# Allegro board GAMEBOARD6.brd
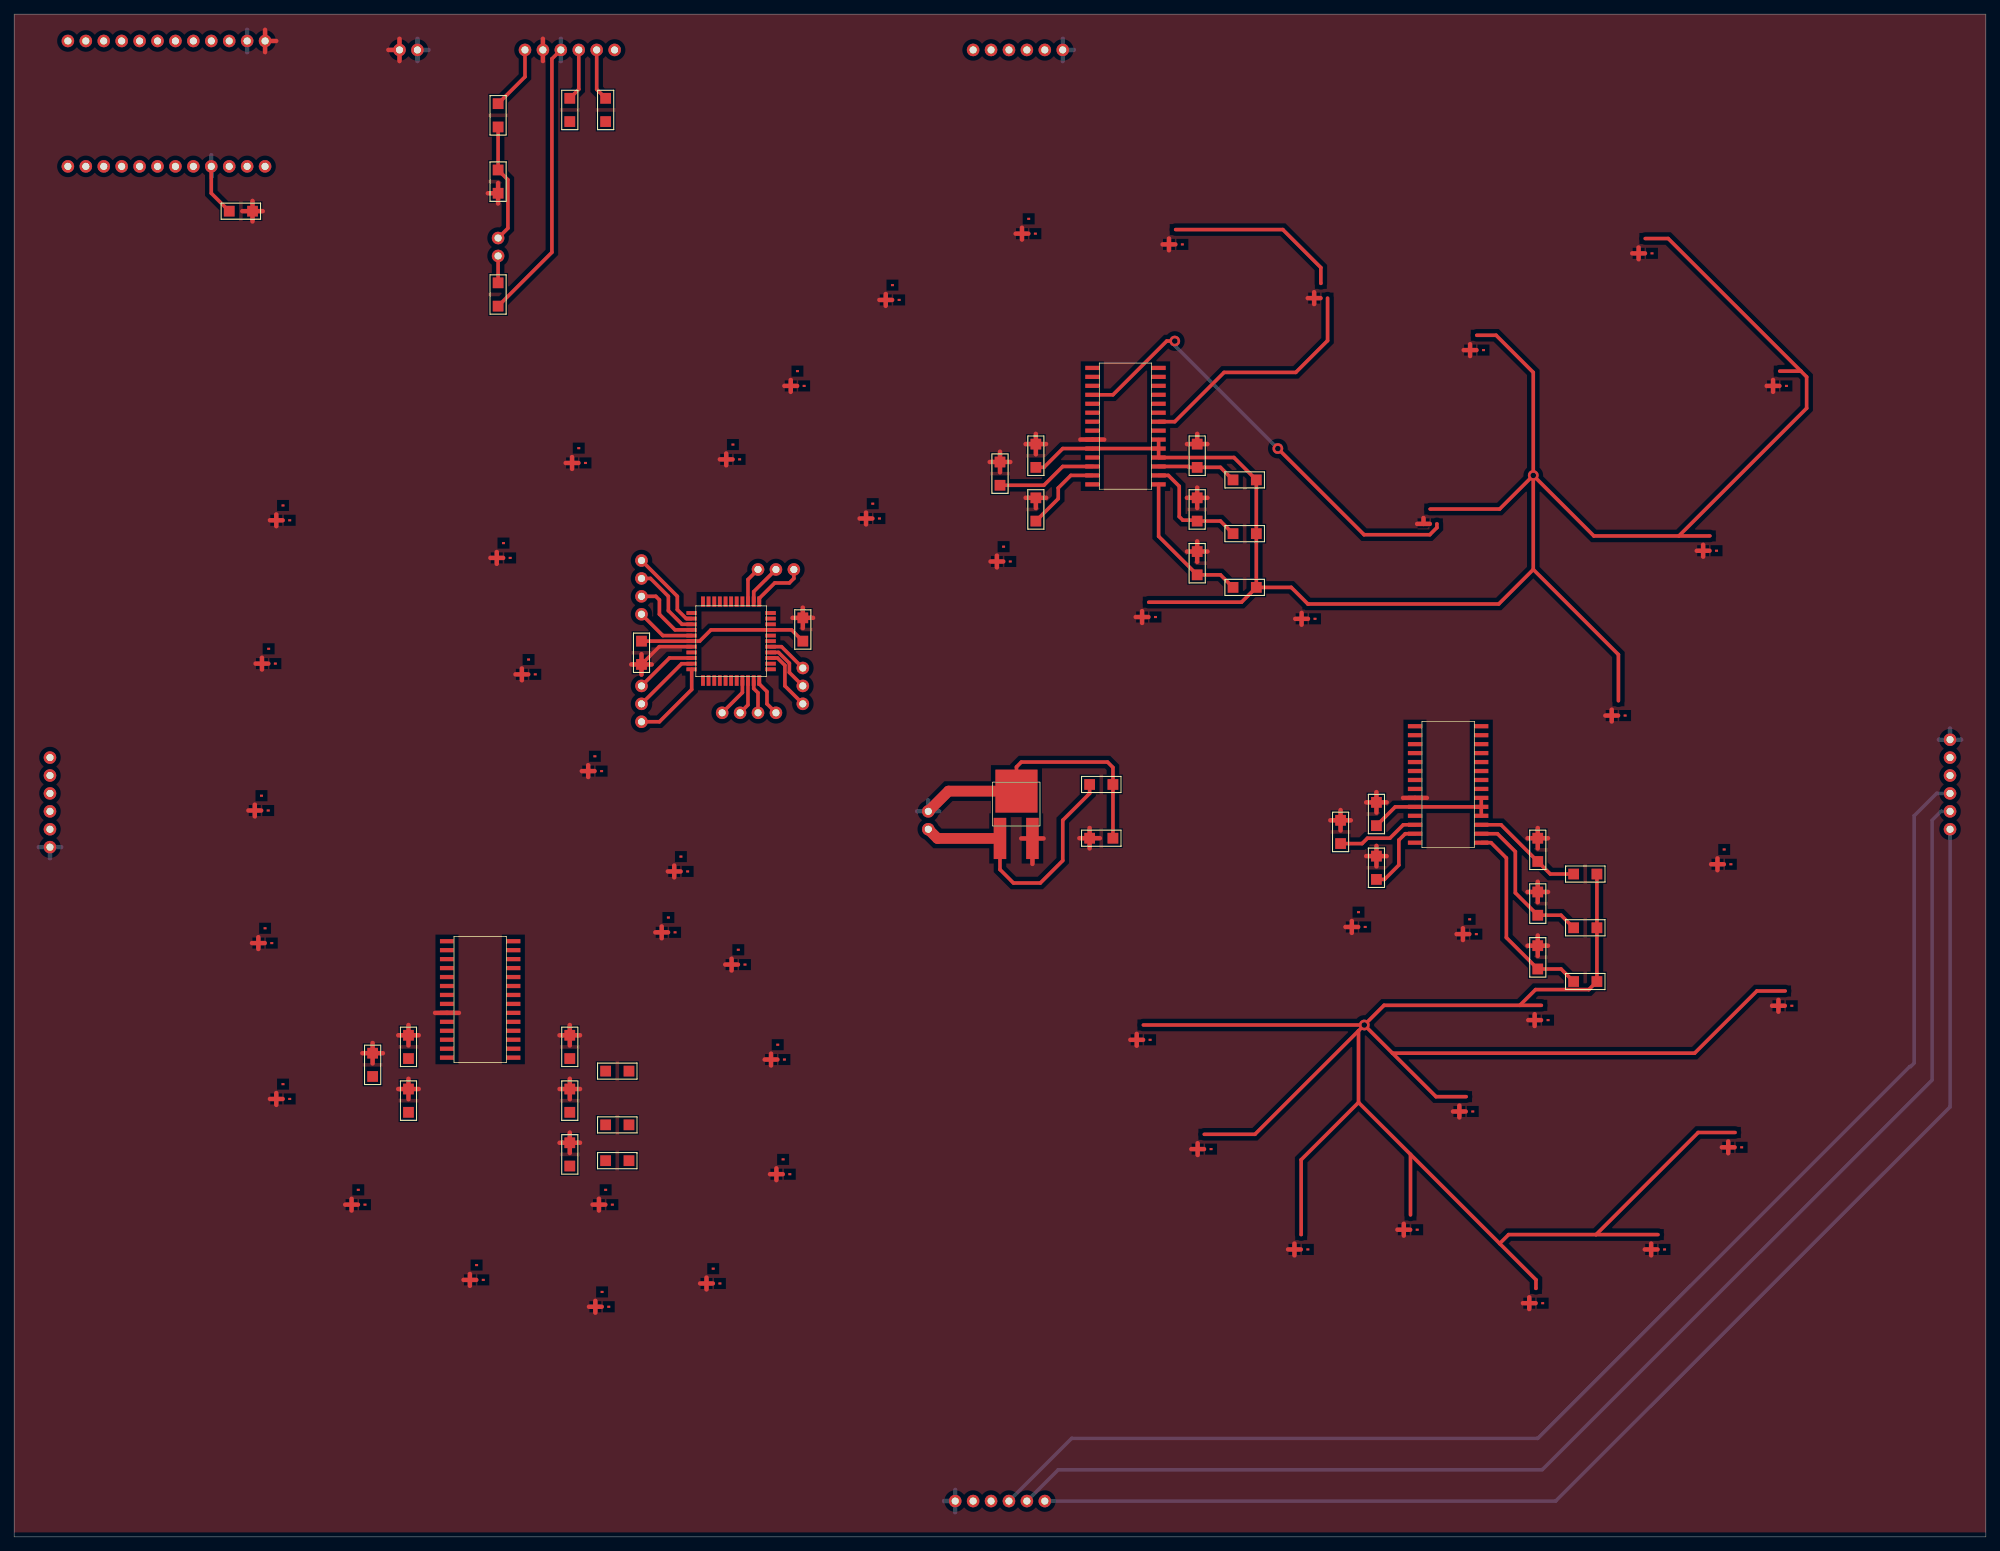
[diagram p0: board, top side]
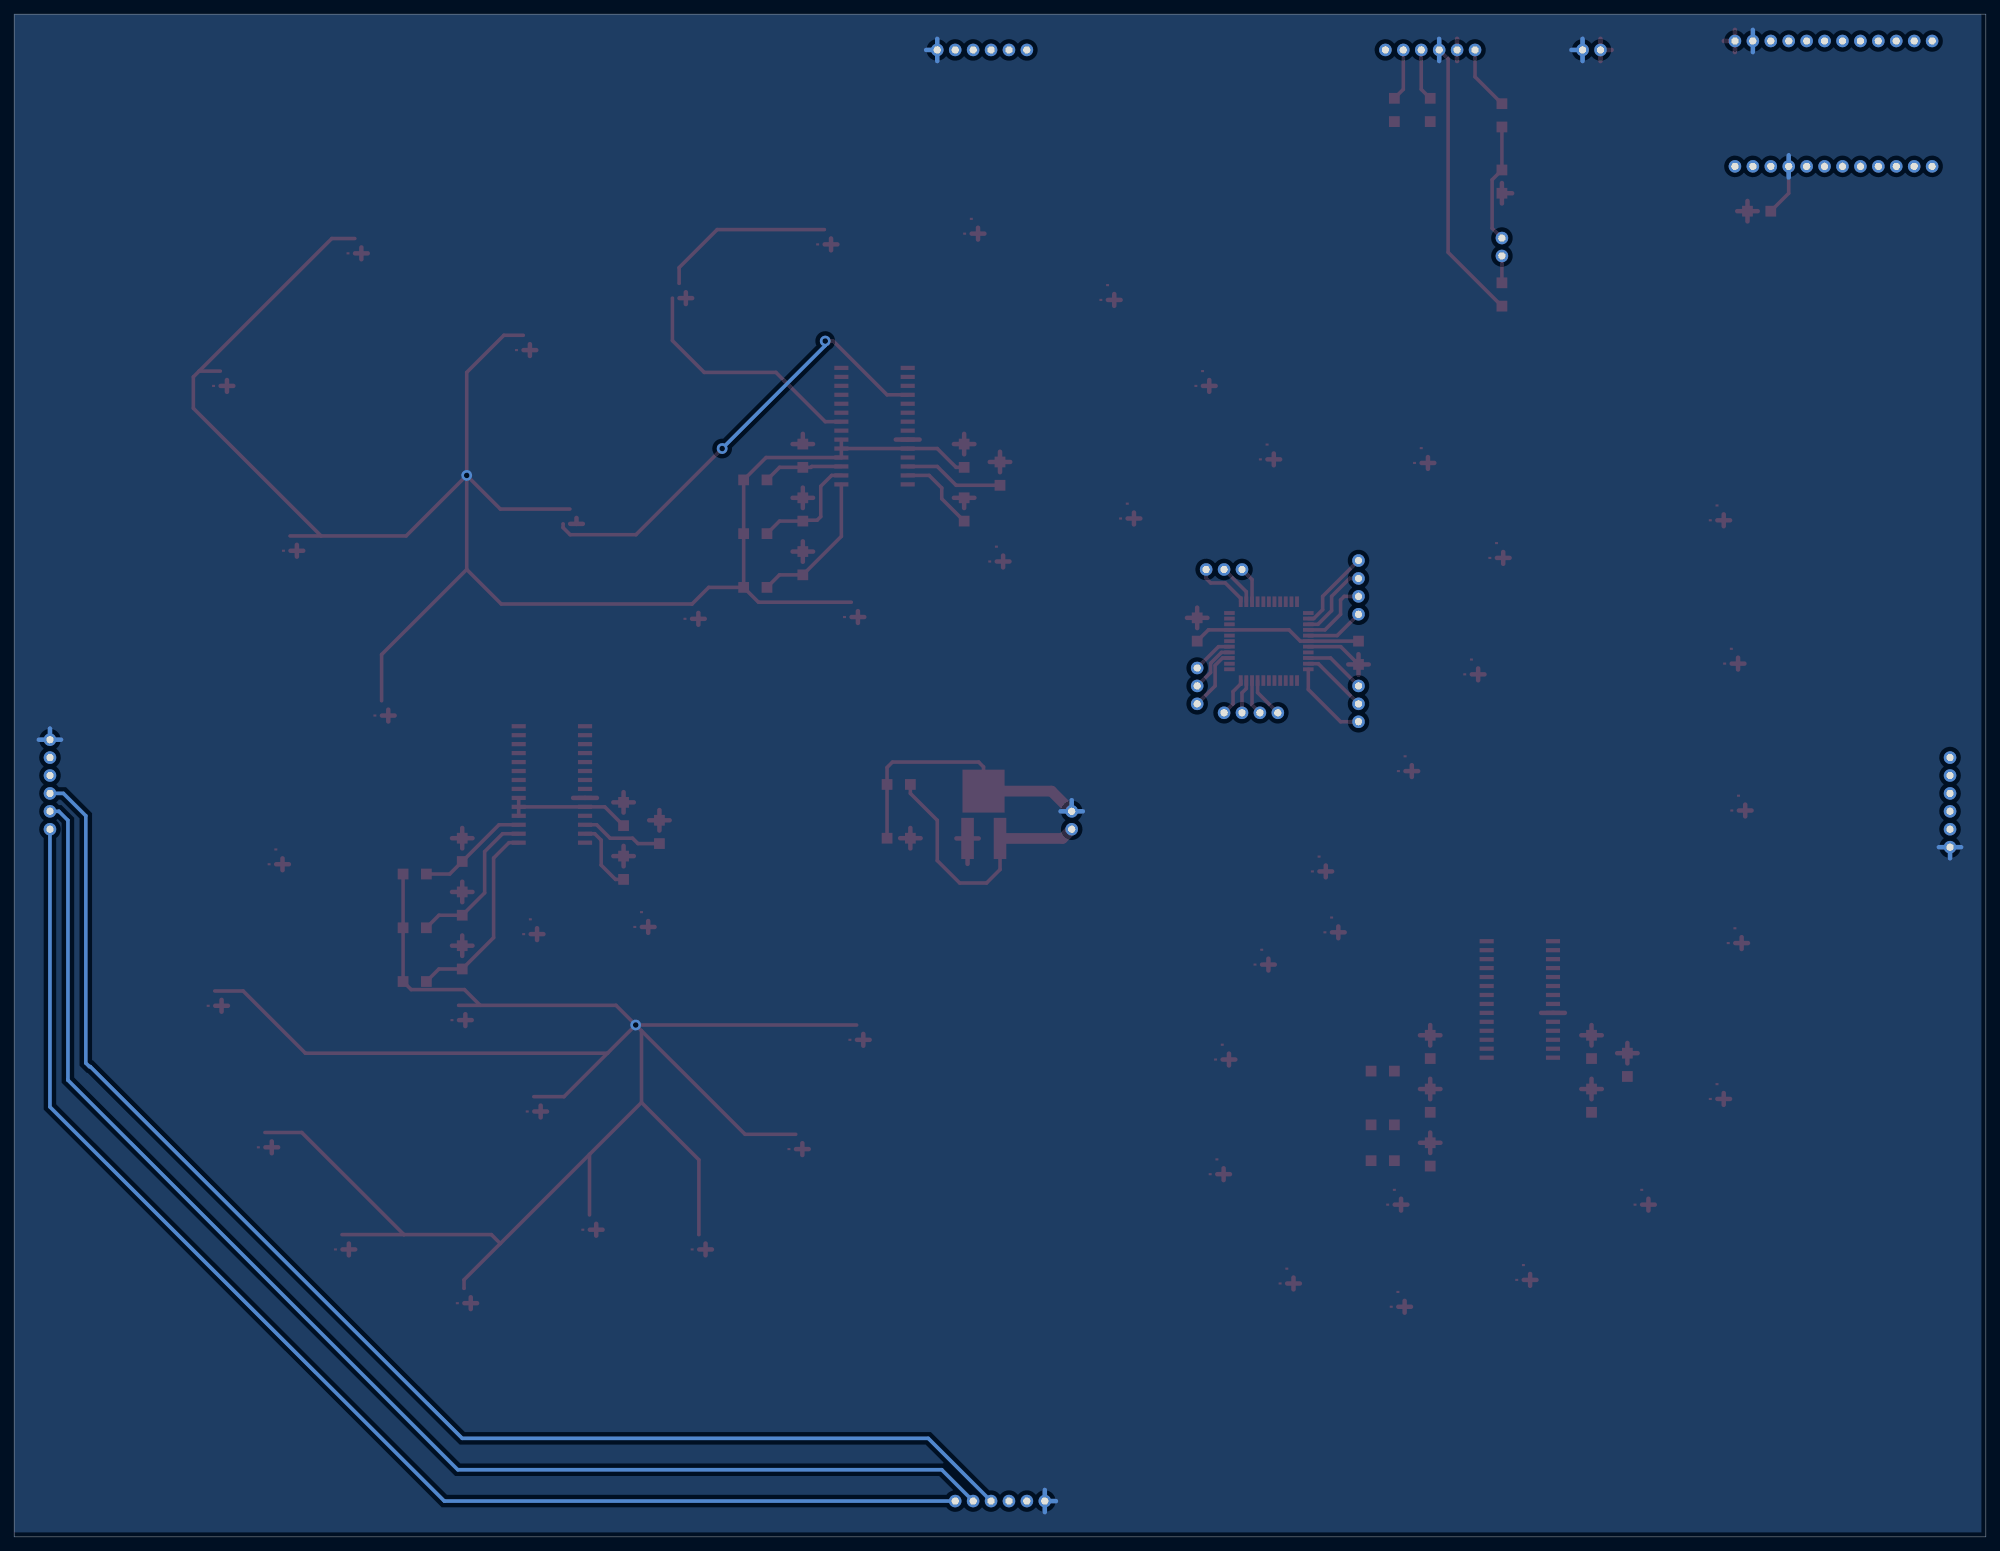
[diagram p1: board, bottom side, seen from below]

Outline 279.4 x 215.9 mm; copper layers: TOP, BOTTOM. Coordinates in mm from the lower left corner of the outline.
Outline path: 0,215.9 0,0 279.4,0 279.4,215.9 0,215.9

## Placement (name value [footprint] x y rotation side)
BT1  7.2V  [HEADER1X2]  129.54 101.6 180 top
C1  0.1 uF, 15V  [SMC1206]  111.76 127 90 top
C2  0.1 uF, 15V  [SMC1206]  88.9 127 270 top
C3  0.1uF  [SMC1206]  30.48 187.96 0 top
C4  0.1 uF, 15V  [SMC1206]  193.04 104.14 270 top
C5  0.1 uF, 15V  [SMC1206]  144.78 154.94 270 top
C6  0.1 uF, 15V  [SMC1206]  55.88 71.12 270 top
C7  0.1uF, 15V  [SMC1206]  152.4 106.68 0 top
C8  0.1uF, 15V  [SMC1206]  152.4 99.06 0 top
C9  0.1 uF, 15V  [SMC1206]  68.58 177.8 270 top
J1  CON3  [HEADER1X3]  106.68 137.16 90 top
J2  CON4  [HEADER1X4]  88.9 132.08 180 top
J3  CON3  [HEADER1X3]  111.76 121.92 0 top
J4  CON3  [HEADER1X3]  88.9 116.84 180 top
J5  CON4  [HEADER1X4]  106.68 116.84 270 top
J6  CON6  [HEADER1X6]  73.66 210.82 90 top
J7  JUMPER  [HEADER1X2]  68.58 182.88 180 top
J8  CON2  [HEADER1X2]  55.88 210.82 90 top
J9  Board Connector  [HEADER1X6]  5.08 109.22 0 top
J10  Board Connector  [HEADER1X6]  137.16 210.82 90 top
J11  Board Connector  [HEADER1X6]  274.32 101.6 180 top
J12  Board Connector  [HEADER1X6]  144.78 5.08 270 top
R1  22 ohm, 1/4W  [SMR1206]  83.82 200.66 90 top
R2  22 ohm, 1/4W  [SMR1206]  78.74 200.66 90 top
R3  10 kohm, 1/4W  [SMR1206]  68.58 190.5 90 top
R4  1 kohm, 1/4W  [SMR1206]  187.96 101.6 270 top
R5  1 kohm, 1/4W  [SMR1206]  139.7 152.4 270 top
R6  1 kohm, 1/4W  [SMR1206]  50.8 68.58 270 top
R7  220 ohm, 1/4W  [SMR1206]  68.58 203.2 270 top
R8  1 kohm, 1/4W  [SMR1206]  193.04 96.52 270 top
R9  1 kohm, 1/4W  [SMR1206]  144.78 147.32 270 top
R10  1 kohm, 1/4W  [SMR1206]  55.88 63.5 270 top
R11  1 kohm, 1/4W  [SMR1206]  215.9 99.06 270 top
R12  1 kohm, 1/4W  [SMR1206]  167.64 154.94 270 top
R13  1 kohm, 1/4W  [SMR1206]  78.74 71.12 270 top
R14  0 ohm, 1/4W  [SMR1206]  220.98 93.98 0 top
R15  0 ohm, 1/4W  [SMR1206]  172.72 149.86 0 top
R16  0 ohm, 1/4W  [SMR1206]  83.82 66.04 0 top
R17  1 kohm, 1/4W  [SMR1206]  215.9 91.44 270 top
R18  1 kohm, 1/4W  [SMR1206]  167.64 147.32 270 top
R19  1 kohm, 1/4W  [SMR1206]  78.74 63.5 270 top
R20  0 ohm, 1/4W  [SMR1206]  220.98 86.36 0 top
R21  0 ohm, 1/4W  [SMR1206]  172.72 142.24 0 top
R22  100 kohm, 1/4W  [SMR1206]  83.82 58.42 0 top
R23  1 kohm, 1/4W  [SMR1206]  215.9 83.82 270 top
R24  1 kohm, 1/4W  [SMR1206]  167.64 139.7 270 top
R25  1 kohm, 1/4W  [SMR1206]  78.74 55.88 270 top
R26  0 ohm, 1/4W  [SMR1206]  220.98 78.74 0 top
R27  100 kohm, 1/4W  [SMR1206]  172.72 134.62 0 top
R28  0 ohm, 1/4W  [SMR1206]  83.82 53.34 0 top
U1  -  [TCS40DPR]  38.1 145.03 0 top
U2  -  [TCS40DPR]  190.5 87.38 0 top
U3  -  [TCS40DPR]  250.19 164.08 0 top
U4  -  [TCS40DPR]  231.14 182.88 0 top
U5  -  [TCS40DPR]  72.9 123.19 0 top
U6  -  [TCS40DPR]  82.3 109.47 0 top
U7  -  [TCS40DPR]  206.25 86.36 0 top
U8  -  [TCS40DPR]  216.41 74.17 0 top
U9  -  [TCS40DPR]  207.26 169.16 0 top
U10  -  [TCS40DPR]  185.17 176.53 0 top
U11  -  [TCS40DPR]  94.49 95.25 0 top
U12  -  [TCS40DPR]  102.62 82.04 0 top
U13  PIC18F47K40-I/PT  [TQFPPIC18F47K40]  101.6 127 0 top
U14  -  [TCS40DPR]  205.74 61.21 0 top
U15  -  [TCS40DPR]  197.87 44.45 0 top
U16  -  [TCS40DPR]  164.59 184.15 0 top
U17  -  [TCS40DPR]  143.76 185.67 0 top
U18  -  [TCS40DPR]  108.2 68.58 0 top
U19  -  [TCS40DPR]  108.97 52.32 0 top
U20  -  [TCS40DPR]  160.02 71.37 0 top
U21  -  [TCS40DPR]  168.66 55.88 0 top
U22  -  [TCS40DPR]  124.46 176.28 0 top
U23  -  [TCS40DPR]  111 164.08 0 top
U24  -  [TCS40DPR]  99.06 36.83 0 top
U25  -  [TCS40DPR]  83.31 33.53 0 top
U26  -  [TCS40DPR]  182.37 41.66 0 top
U27  -  [TCS40DPR]  215.65 34.04 0 top
U28  -  [TCS40DPR]  200.66 144.53 0 top
U29  -  [TCS40DPR]  183.39 131.06 0 top
U30  -  [TCS40DPR]  92.71 86.61 0 top
U31  -  [TCS40DPR]  83.82 48.01 0 top
U32  -  [TCS40DPR]  232.92 41.66 0 top
U33  -  [TCS40DPR]  243.84 56.13 0 top
U34  -  [TCS40DPR]  160.78 131.32 0 top
U35  -  [TCS40DPR]  140.21 139.19 0 top
U36  -  [TCS40DPR]  65.53 37.34 0 top
U37  -  [TCS40DPR]  48.77 48.01 0 top
U38  -  [TCS40DPR]  250.95 76.2 0 top
U39  -  [TCS40DPR]  242.32 96.27 0 top
U40  -  [TCS40DPR]  121.67 145.29 0 top
U41  -  [TCS40DPR]  101.85 153.67 0 top
U42  -  [TCS40DPR]  38.1 62.99 0 top
U43  -  [TCS40DPR]  35.56 85.09 0 top
U45  -  [TCS40DPR]  227.33 117.35 0 top
U46  -  [TCS40DPR]  240.28 140.72 0 top
U47  -  [TCS40DPR]  80.01 153.16 0 top
U48  -  [TCS40DPR]  69.34 139.7 0 top
U49  -  [TCS40DPR]  35.05 103.89 0 top
U50  -  [TCS40DPR]  36.07 124.71 0 top
U51  MCP23017T  [MCP23017]  203.2 106.68 0 top
U52  MCP23017T  [MCP23017]  157.48 157.48 0 top
U53  MCP23017T  [MCP23017]  66.04 76.2 0 top
U54  MIC29310-5.0WU  [TO252AA]  139.7 99.06 0 top
U57  Photon  [PHOTONFOOTPRINT]  15.24 203.2 90 top

## Library data of the parts
BT1 = BATTERY
C1-C9 = CAP NP
J1 J3 J4 = CON3
J2 J5 = CON4
J6 = CON6
J7 = JUMPER
J8 = CON2
J9-J12 = Board Connector
R1-R28 = R
U1-U12 U14-U43 U45-U50 = TCS40DPR
U13 = PIC18F47K40-I/PT_0
U51-U53 = MCP23017T
U54 = MIC29310-5.0WU
U57 = Photon

## Footprints (pads in the part's own frame, mm; a bottom-side part is the same pattern mirrored in y, then rotated)
HEADER1X2
  round 1.778 hole 1.016: 1(0,1.27) 2(0,-1.27)
HEADER1X3
  round 1.778 hole 1.016: 1(0,1.27) 2(0,-1.27) 3(0,-3.81)
HEADER1X4
  round 1.778 hole 1.016: 1(0,1.27) 2(0,-1.27) 3(0,-3.81) 4(0,-6.35)
HEADER1X6
  round 1.778 hole 1.016: 1(0,1.27) 2(0,-1.27) 3(0,-3.81) 4(0,-6.35) 5(0,-8.89) 6(0,-11.43)
MCP23017
  rect 2x0.6 smd: 1(-4.699,8.255) 2(-4.699,6.985) 3(-4.699,5.715) 4(-4.699,4.445) 5(-4.699,3.175) 6(-4.699,1.905) 7(-4.699,0.635) 8(-4.699,-0.635) 9(-4.699,-1.905) 10(-4.699,-3.175) 11(-4.699,-4.445) 12(-4.699,-5.715) 13(-4.699,-6.985) 14(-4.699,-8.255) 15(4.699,-8.255) 16(4.699,-6.985) 17(4.699,-5.715) 18(4.699,-4.445) 19(4.699,-3.175) 20(4.699,-1.905) 21(4.699,-0.635) 22(4.699,0.635) 23(4.699,1.905) 24(4.699,3.175) 25(4.699,4.445) 26(4.699,5.715) 27(4.699,6.985) 28(4.699,8.255)
PHOTONFOOTPRINT
  round 1.778 hole 1.016: 1(8.89,7.62) 2(8.89,5.08) 3(8.89,2.54) 4(8.89,0) 5(8.89,-2.54) 6(8.89,-5.08) 7(8.89,-7.62) 8(8.89,-10.16) 9(8.89,-12.7) 10(8.89,-15.24) 11(8.89,-17.78) 12(8.89,-20.32) 13(-8.89,7.62) 14(-8.89,5.08) 15(-8.89,2.54) 16(-8.89,0) 17(-8.89,-2.54) 18(-8.89,-5.08) 19(-8.89,-7.62) 20(-8.89,-10.16) 21(-8.89,-12.7) 22(-8.89,-15.24) 23(-8.89,-17.78) 24(-8.89,-20.32)
SMC1206
  rect 1.524x1.524 smd: 1(0,0) 2(3.302,0)
SMR1206
  rect 1.524x1.524 smd: 1(0,0) 2(3.302,0)
TCS40DPR
  rect 0.42x0.3 smd: 1(-0.95,-0.9) 2(0.95,-0.9) 3(0,1.2)
TO252AA
  rect 1.778x5.842 smd: 1(-0.004,-0.034) 3(4.596,-0.034)
  rect 5.969x6.096 smd: 2(2.332,6.673)
TQFPPIC18F47K40
  rect 1.5x0.55 smd: 1(-5.588,3.988) 2(-5.588,3.2) 3(-5.588,2.388) 4(-5.588,1.6) 5(-5.588,0.787) 6(-5.588,0) 7(-5.588,-0.787) 8(-5.588,-1.6) 9(-5.588,-2.388) 10(-5.588,-3.2) 11(-5.588,-3.988) 23(5.588,-3.988) 24(5.588,-3.2) 25(5.588,-2.388) 26(5.588,-1.6) 27(5.588,-0.787) 28(5.588,0) 29(5.588,0.787) 30(5.588,1.6) 31(5.588,2.388) 32(5.588,3.2) 33(5.588,3.988)
  rect 0.55x1.5 smd: 12(-3.988,-5.588) 13(-3.2,-5.588) 14(-2.388,-5.588) 15(-1.6,-5.588) 16(-0.787,-5.588) 17(0,-5.588) 18(0.787,-5.588) 19(1.6,-5.588) 20(2.388,-5.588) 21(3.2,-5.588) 22(3.988,-5.588) 34(3.988,5.588) 35(3.2,5.588) 36(2.388,5.588) 37(1.6,5.588) 38(0.787,5.588) 39(0,5.588) 40(-0.787,5.588) 41(-1.6,5.588) 42(-2.388,5.588) 43(-3.2,5.588) 44(-3.988,5.588)

## Nets
GND: BT1.2(-) C1.1 C2.1 C3.1 C4.2 C5.2 C6.2 C7.2 C8.2 C9.2 J6.3 J8.2 J9.6(GND) J10.6(GND) J11.6(GND) J12.6(GND) R14.2 R15.2 R16.2 R20.2 R21.2 R22.2 R26.2 R27.2 R28.2 U1.3(GND) U2.3(GND) U3.3(GND) U4.3(GND) U5.3(GND) U6.3(GND) U7.3(GND) U8.3(GND) U9.3(GND) U10.3(GND) U11.3(GND) U12.3(GND) U13.6(VSS_0) U13.30(VSS_1) U14.3(GND) U15.3(GND) U16.3(GND) U17.3(GND) U18.3(GND) U19.3(GND) U20.3(GND) U21.3(GND) U22.3(GND) U23.3(GND) U24.3(GND) U25.3(GND) U26.3(GND) U27.3(GND) U28.3(GND) U29.3(GND) U30.3(GND) U31.3(GND) U32.3(GND) U33.3(GND) U34.3(GND) U35.3(GND) U36.3(GND) U37.3(GND) U38.3(GND) U39.3(GND) U40.3(GND) U41.3(GND) U42.3(GND) U43.3(GND) U45.3(GND) U46.3(GND) U47.3(GND) U48.3(GND) U49.3(GND) U50.3(GND) U51.10(VSS) U51.18(RESET) U51.19(INTB) U51.20(INTA) U52.10(VSS) U52.18(RESET) U52.19(INTB) U52.20(INTA) U53.10(VSS) U53.18(RESET) U53.19(INTB) U53.20(INTA) U54.2(GND) U57.11 U57.21
5 V: C1.2 C2.2 C3.2 C4.1 C5.1 C6.1 C8.1 J6.2 J8.1 R3.1 R4.1 R5.1 R6.1 R8.1 R9.1 R10.1 R11.1 R12.1 R13.1 R17.1 R18.1 R19.1 R23.1 R24.1 R25.1 U1.1(VCC) U2.1(VCC) U3.1(VCC) U4.1(VCC) U5.1(VCC) U6.1(VCC) U7.1(VCC) U8.1(VCC) U9.1(VCC) U10.1(VCC) U11.1(VCC) U12.1(VCC) U13.7(VDD_0) U13.28(VDD_1) U14.1(VCC) U15.1(VCC) U16.1(VCC) U17.1(VCC) U18.1(VCC) U19.1(VCC) U20.1(VCC) U21.1(VCC) U22.1(VCC) U23.1(VCC) U24.1(VCC) U25.1(VCC) U26.1(VCC) U27.1(VCC) U28.1(VCC) U29.1(VCC) U30.1(VCC) U31.1(VCC) U32.1(VCC) U33.1(VCC) U34.1(VCC) U35.1(VCC) U36.1(VCC) U37.1(VCC) U38.1(VCC) U39.1(VCC) U40.1(VCC) U41.1(VCC) U42.1(VCC) U43.1(VCC) U45.1(VCC) U46.1(VCC) U47.1(VCC) U48.1(VCC) U49.1(VCC) U50.1(VCC) U51.9(VDD) U52.9(VDD) U53.9(VDD) U54.3(OUT) U57.12
CD1: J9.5(CD) U13.39(RD0)
CD2: J10.5(CD) U13.38(RD1)
CD3: J11.5(CD) U13.33(RA6)
CD4: J12.5(CD) U13.32(RA7)
ICSPCLK: R1.1 U13.16(ICSPCLK/RB6)
ICSPDAT: R2.1 U13.17(ICSPDAT/RB7)
MCLR/VPP: J6.1 R7.1 U13.18(VPP/MCLR/RE3)
SCK: R4.2 R5.2 R6.2 U13.37(RC3) U51.12(SCK) U52.12(SCK) U53.12(SCK) U57.14
SCK1: J9.1(SCK) J10.1(SCK) J11.1(SCK) J12.1(SCK)
SDA: R8.2 R9.2 R10.2 U13.42(RC4) U51.13(SDA) U52.13(SDA) U53.13(SDA) U57.13
SDI1: J9.2(SDI) J10.2(SDI) J11.2(SDI) J12.2(SDI)
SDO1: J9.3(SDO) J10.3(SDO) J11.3(SDO) J12.3(SDO)
SS1: J9.4(SS) U13.44(RC6)
SS2: J10.4(SS) U13.43(RC5)
SS3: J11.4(SS) U13.41(RD3)
SS4: J12.4(SS) U13.40(RD2)
N40578: U6.2(VOUT) U53.21(GPA0)
N40604: U12.2(VOUT) U53.22(GPA1)
N40612: U19.2(VOUT) U53.23(GPA2)
N40620: U25.2(VOUT) U53.24(GPA3)
N40628: U31.2(VOUT) U53.25(GPA4)
N40636: U37.2(VOUT) U53.26(GPA5)
N40644: U43.2(VOUT) U53.27(GPA6)
N40652: U50.2(VOUT) U53.28(GPA7)
N41000: R19.2 R22.1 U53.16(A1)
N41020: R25.2 R28.1 U53.15(A0)
N41032: R13.2 R16.1 U53.17(A2)
N41290: U1.2(VOUT) U51.8(GPB7)
N41302: U7.2(VOUT) U51.7(GPB6)
N41314: U14.2(VOUT) U51.6(GPB5)
N41326: U20.2(VOUT) U51.5(GPB4)
N41338: U26.2(VOUT) U51.4(GPB3)
N41350: U32.2(VOUT) U51.3(GPB2)
N41362: U38.2(VOUT) U51.2(GPB1)
N41374: U45.2(VOUT) U51.1(GPB0)
N41442: U2.2(VOUT) U51.21(GPA0)
N41446: U8.2(VOUT) U51.22(GPA1)
N41450: U15.2(VOUT) U51.23(GPA2)
N41454: U21.2(VOUT) U51.24(GPA3)
N41458: U27.2(VOUT) U51.25(GPA4)
N41462: U33.2(VOUT) U51.26(GPA5)
N41466: U39.2(VOUT) U51.27(GPA6)
N41734: U46.2(VOUT) U51.28(GPA7)
N42242: R17.2 R20.1 U51.16(A1)
N42246: R23.2 R26.1 U51.15(A0)
N42268: R11.2 R14.1 U51.17(A2)
N42276: R24.2 R27.1 U52.15(A0)
N42308: R18.2 R21.1 U52.16(A1)
N42508: J7.2 R3.2 R7.2
N42712: U3.2(VOUT) U52.8(GPB7)
N42740: U9.2(VOUT) U52.7(GPB6)
N42752: U16.2(VOUT) U52.6(GPB5)
N42772: U22.2(VOUT) U52.5(GPB4)
N42784: U28.2(VOUT) U52.4(GPB3)
N42796: U34.2(VOUT) U52.3(GPB2)
N42808: U40.2(VOUT) U52.2(GPB1)
N42820: U47.2(VOUT) U52.1(GPB0)
N42884: U4.2(VOUT) U52.21(GPA0)
N42896: U10.2(VOUT) U52.22(GPA1)
N42900: U17.2(VOUT) U52.23(GPA2)
N42904: U23.2(VOUT) U52.24(GPA3)
N42908: U29.2(VOUT) U52.25(GPA4)
N42912: U35.2(VOUT) U52.26(GPA5)
N42916: U41.2(VOUT) U52.27(GPA6)
N43192: U48.2(VOUT) U52.28(GPA7)
N43224: C9.1 J7.1
N43624: R12.2 R15.1 U52.17(A2)
N43852: U5.2(VOUT) U53.8(GPB7)
N43864: U11.2(VOUT) U53.7(GPB6)
N43876: U18.2(VOUT) U53.6(GPB5)
N43888: U24.2(VOUT) U53.5(GPB4)
N43900: U30.2(VOUT) U53.4(GPB3)
N43912: U36.2(VOUT) U53.3(GPB2)
N43924: U42.2(VOUT) U53.2(GPB1)
N43936: U49.2(VOUT) U53.1(GPB0)
N104053: BT1.1(+) C7.1 U54.1(IN)
N111887: J6.4 R2.2
N111889: J6.5 R1.2
N118143: J3.1 U13.27(RE2)
N118150: J3.2 U13.26(RE1)
N118163: J3.3 U13.25(RE0)
N118167: J5.1 U13.22(RA3)
N118185: J5.4 U13.19(RA0)
N118192: J2.4 U13.2(RD4)
N118196: J2.3 U13.3(RD5)
N118203: J2.2 U13.4(RD6)
N118215: J2.1 U13.5(RD7)
N118227: J4.3 U13.9(RB0)
N118234: J4.2 U13.10(RB1)
N118238: J4.1 U13.11(RB2)
N118679: J1.1 U13.36(RC2)
N118686: J1.2 U13.35(RC1)
N118690: J1.3 U13.34(RC0)
N128561: J5.2 U13.21(RA2)
N128579: J5.3 U13.20(RA1)

Pads without a net: J6 6; U13 1 8 12 13 14 15 23 24 29 31; U51 11 14; U52 11 14; U53 11 14; U57 1 2 3 4 5 6 7 8 9 10 15 16 17 18 19 20 22 23 24

## Via types
v1: diameter 1.524, hole 0.8, TOP to BOTTOM, 4 vias

## Routing (per net, layer and track width the routed paths; a pad name or vN(x,y) marks a point on that pad's centre or on a via; arc(x,y) is an arc through that point)
GND: length 793.4
  TOP w0.508: C8.2 C7.2 155.7,109.09 154.94,109.86 142.73,109.86 142.03,109.16 U54.2 ; v1(215.26,150.5) 215.26,137.16 ; v1(215.26,150.5) 223.84,141.92 235.9,141.92 ; v1(215.26,150.5) 215.26,165.1 210,170.36 U9.3 ; v1(215.26,150.5) 210.5,145.73 U28.3 ; 215.26,137.16 227.33,125.09 U45.3 ; 215.26,137.16 210.37,132.26 U29.3 183.33,132.26 180.97,134.62 R27.2 ; 190.5,61.59 182.37,53.47 U26.3 ; 190.5,61.59 197.87,54.23 ; 190.5,61.59 190.5,71.75 ; C2.1 U13.6 97.14,127 98.74,128.6 U13.30 110.16,128.6 C1.1 ; 253.18,165.28 234.39,184.08 U4.3 ; 253.18,165.28 U3.3 ; 253.18,165.28 254,164.47 254,160.02 235.9,141.92 ; 207.9,103.5 U51.18 ; 207.9,103.5 195.71,103.5 C4.2 ; 207.9,103.5 U51.20 ; U27.3 215.65,36.45 210.5,41.59 ; U32.3 224.16,42.86 ; 224.16,42.86 211.77,42.86 210.5,41.59 ; 224.16,42.86 238.63,57.33 U33.3 ; U21.3 175.82,57.08 190.5,71.75 ; 195.31,68.58 238.12,68.58 246.94,77.4 U38.3 ; 195.31,68.58 v1(191.32,72.57) ; 195.31,68.58 201.48,62.41 U14.3 ; 210.5,41.59 197.87,54.23 ; U34.3 173.92,132.52 R27.2 ; U15.3 197.87,54.23 ; v1(191.32,72.57) 190.5,71.75 ; v1(191.32,72.57) U20.3 ; v1(191.32,72.57) 194.11,75.37 213.36,75.37 ; R27.2 R21.2 R15.2 172.85,153.03 U52.18 U52.19 ; 213.36,75.37 U8.3 ; 213.36,75.37 215.59,77.6 223.14,77.6 R26.2 R20.2 R14.2 ; U46.3 235.9,141.92 ; U52.19 U52.10 148.59,154.31 145.92,151.64 C5.2 ; U52.19 U52.20 ; U16.3 179.78,185.35 185.17,179.96 U10.3 ; C3.1 27.94,190.5 U57.21 ; J6.3 76.2,209.55 76.2,182.12 C9.2
  TOP w1.524: BT1.2 132.4,105.73 U54.2
  BOTTOM w0.635: J11.6 275.9,113.03 ; J11.6 272.74,113.03 ; J11.6 274.32,114.61 ; 131.77,5.08 J12.6 ; J12.6 133.35,3.5 ; J12.6 133.35,6.66 ; 27.94,192.73 U57.21 27.94,195.89 ; 5.08,96.21 J9.6 ; J9.6 3.5,97.79 ; J9.6 6.66,97.79 ; 77.47,209.24 J6.3 77.47,212.4 ; J8.2 57.15,212.4 ; J8.2 57.15,209.24 ; J8.2 58.73,210.82 ; 127.96,102.87 BT1.2 ; BT1.2 129.54,104.45 ; BT1.2 131.12,102.87 ; 33.02,213.67 U57.11 33.02,210.51 ; J10.6 148.59,212.4 ; J10.6 148.59,209.24 ; J10.6 150.17,210.82
5 V: length 332
  TOP w0.508: C2.2 91.41,126.21 U13.7
  TOP w0.635: C1.2 111.76,131.75 ; C1.2 111.76,128.85 ; C1.2 110.31,130.3 ; C1.2 113.21,130.3 ; U9.1 207.21,168.26 ; U9.1 206.31,169.1 ; U9.1 206.31,167.43 ; U9.1 205.42,168.26 ; 100.77,81.14 U12.1 ; U12.1 101.67,81.98 ; U12.1 102.56,81.14 ; U12.1 101.67,80.31 ; 204.79,59.48 U14.1 ; U14.1 203.89,60.31 ; U14.1 205.69,60.31 ; U14.1 204.79,61.15 ; U33.1 242.89,56.07 ; U33.1 242.89,54.4 ; U33.1 243.79,55.23 ; U33.1 241.99,55.23 ; C8.1 152.4,100.51 ; C8.1 152.4,97.61 ; C8.1 150.95,99.06 ; C8.1 153.85,99.06 ; 225.48,116.45 U45.1 ; U45.1 227.28,116.45 ; U45.1 226.38,117.28 ; U45.1 226.38,115.61 ; 88.9,122.25 C2.2 ; C2.2 87.45,123.7 ; C2.2 88.9,125.15 ; C2.2 90.35,123.7 ; 239.33,138.98 U46.1 ; U46.1 239.33,140.65 ; U46.1 238.44,139.82 ; U46.1 240.23,139.82 ; U27.1 215.59,33.14 ; U27.1 213.8,33.14 ; U27.1 214.7,33.97 ; U27.1 214.7,32.3 ; R3.1 68.58,191.95 ; R3.1 68.58,189.05 ; R3.1 67.13,190.5 ; U38.1 250,76.14 ; U38.1 250.9,75.3 ; U38.1 250,74.46 ; U38.1 249.11,75.3 ; 196.02,43.55 U15.1 ; U15.1 196.92,44.39 ; U15.1 196.92,42.71 ; U15.1 197.81,43.55 ; 36.25,62.09 U42.1 ; U42.1 38.05,62.09 ; U42.1 37.15,61.26 ; U42.1 37.15,62.93 ; 35.56,210.51 U57.12 ; U57.12 35.56,213.67 ; U57.12 37.14,212.09 ; U16.1 164.54,183.25 ; U16.1 163.64,182.41 ; U16.1 163.64,184.09 ; U16.1 162.75,183.25 ; U19.1 108.91,51.42 ; U19.1 108.02,52.26 ; U19.1 108.02,50.59 ; U19.1 107.12,51.42 ; U10.1 185.11,175.63 ; U10.1 184.22,174.79 ; U10.1 183.32,175.63 ; U10.1 184.22,176.47 ; R13.1 80.19,71.12 ; R13.1 77.29,71.12 ; R13.1 78.74,72.57 ; R13.1 78.74,69.67 ; 191.59,104.14 C4.1 ; C4.1 193.04,102.69 ; C4.1 194.49,104.14 ; C4.1 193.04,105.59 ; 106.36,67.68 U18.1 ; U18.1 107.25,68.52 ; U18.1 107.25,66.84 ; U18.1 108.15,67.68 ; C6.1 55.88,72.57 ; C6.1 57.33,71.12 ; C6.1 54.43,71.12 ; C6.1 55.88,69.67 ; U26.1 181.42,41.59 ; U26.1 180.53,40.76 ; U26.1 181.42,39.92 ; U26.1 182.32,40.76 ; U34.1 160.73,130.42 ; U34.1 159.83,131.25 ; U34.1 158.94,130.42 ; U34.1 159.83,129.58 ; U22.1 123.51,176.21 ; U22.1 123.51,174.54 ; U22.1 122.61,175.38 ; U22.1 124.41,175.38 ; U43.1 34.61,85.03 ; U43.1 35.51,84.19 ; U43.1 33.71,84.19 ; U43.1 34.61,83.35 ; U24.1 98.11,36.77 ; U24.1 99.01,35.93 ; U24.1 98.11,35.09 ; U24.1 97.21,35.93 ; U37.1 47.82,47.94 ; U37.1 48.71,47.11 ; U37.1 47.82,46.27 ; U37.1 46.92,47.11 ; U41.1 101.8,152.77 ; U41.1 100.01,152.77 ; U41.1 100.9,153.61 ; U41.1 100.9,151.93 ; U25.1 83.26,32.63 ; U25.1 82.36,33.46 ; U25.1 82.36,31.79 ; U25.1 81.47,32.63 ; R11.1 215.9,100.51 ; R11.1 215.9,97.61 ; R11.1 217.35,99.06 ; R11.1 214.45,99.06 ; R10.1 55.88,64.95 ; R10.1 55.88,62.05 ; R10.1 54.43,63.5 ; R10.1 57.33,63.5 ; 167.71,54.14 U21.1 ; U21.1 166.81,54.98 ; U21.1 167.71,55.82 ; U21.1 168.6,54.98 ; 240.47,95.37 U39.1 ; U39.1 241.37,94.53 ; U39.1 241.37,96.2 ; U39.1 242.26,95.37 ; U40.1 121.61,144.39 ; U40.1 120.72,145.22 ; U40.1 119.82,144.39 ; U40.1 120.72,143.55 ; U23.1 110.94,163.18 ; U23.1 110.05,164.02 ; U23.1 110.05,162.35 ; U23.1 109.15,163.18 ; U20.1 159.97,70.47 ; U20.1 158.17,70.47 ; U20.1 159.07,69.64 ; U20.1 159.07,71.31 ; 144.3,95.42 U54.3 ; U54.3 145.87,99.03 ; U54.3 142.72,99.03 ; 214.45,83.82 R23.1 ; R23.1 215.9,82.37 ; R23.1 217.35,83.82 ; R23.1 215.9,85.27 ; R8.1 194.49,96.52 ; R8.1 191.59,96.52 ; R8.1 193.04,95.07 ; R8.1 193.04,97.97 ; 33.21,102.99 U49.1 ; U49.1 35,102.99 ; U49.1 34.1,103.82 ; U49.1 34.1,102.15 ; R24.1 169.09,139.7 ; R24.1 166.19,139.7 ; R24.1 167.64,138.25 ; R24.1 167.64,141.15 ; 67.5,138.8 U48.1 ; U48.1 68.39,139.64 ; U48.1 69.29,138.8 ; U48.1 68.39,137.96 ; U35.1 140.15,138.29 ; U35.1 138.36,138.29 ; U35.1 139.26,139.13 ; U35.1 139.26,137.46 ; 198.81,143.63 U28.1 ; U28.1 199.71,144.46 ; U28.1 200.61,143.63 ; 204.4,85.46 U7.1 ; U7.1 205.3,86.3 ; U7.1 205.3,84.62 ; U7.1 206.19,85.46 ; 248.34,163.18 U3.1 ; U3.1 250.14,163.18 ; U3.1 249.24,164.02 ; U3.1 249.24,162.35 ; U2.1 190.45,86.48 ; U2.1 188.65,86.48 ; U2.1 189.55,87.31 ; U2.1 189.55,85.64 ; U1.1 37.15,144.97 ; U1.1 36.25,144.13 ; U1.1 37.15,143.3 ; U1.1 38.05,144.13 ; U17.1 143.71,184.77 ; U17.1 142.81,185.61 ; U17.1 142.81,183.94 ; U17.1 141.92,184.77 ; 49.35,68.58 R6.1 ; R6.1 50.8,70.03 ; R6.1 50.8,67.13 ; R6.1 52.25,68.58 ; U4.1 231.09,181.98 ; U4.1 229.29,181.98 ; U4.1 230.19,182.82 ; U4.1 230.19,181.14 ; 167.64,145.87 R18.1 ; R18.1 167.64,148.77 ; R18.1 169.09,147.32 ; R18.1 166.19,147.32 ; 215.9,89.99 R17.1 ; R17.1 217.35,91.44 ; R17.1 215.9,92.89 ; R17.1 214.45,91.44 ; R9.1 146.23,147.32 ; R9.1 143.33,147.32 ; R9.1 144.78,145.87 ; 34.22,123.81 U50.1 ; U50.1 36.01,123.81 ; U50.1 35.12,122.98 ; U50.1 35.12,124.65 ; 231.07,40.76 U32.1 ; U32.1 231.97,39.92 ; U32.1 232.86,40.76 ; U32.1 231.97,41.59 ; 79.06,151.43 U47.1 ; U47.1 79.06,153.1 ; U47.1 79.96,152.26 ; U47.1 78.16,152.26 ; 200.19,104.78 U51.9 196.81,104.78 ; R4.1 187.96,103.05 ; R4.1 189.41,101.6 ; R4.1 187.96,100.15 ; R4.1 186.51,101.6 ; 139.7,150.95 R5.1 ; R5.1 139.7,153.85 ; R5.1 138.25,152.4 ; R5.1 141.15,152.4 ; 78.74,62.05 R19.1 ; R19.1 77.29,63.5 ; R19.1 78.74,64.95 ; R19.1 80.19,63.5 ; 154.47,155.57 U52.9 151.09,155.57 ; C5.1 144.78,156.39 ; C5.1 146.23,154.94 ; C5.1 143.33,154.94 ; C5.1 144.78,153.49 ; 181.54,130.16 U29.1 ; U29.1 182.44,129.33 ; U29.1 183.33,130.16 ; U29.1 182.44,131 ; U11.1 93.54,95.19 ; U11.1 94.43,94.35 ; U11.1 93.54,93.51 ; U11.1 92.64,94.35 ; 32.33,187.96 C3.2 ; C3.2 35.23,187.96 ; C3.2 33.78,186.51 ; C3.2 33.78,189.41 ; 91.76,84.88 U30.1 ; U30.1 92.66,85.71 ; U30.1 91.76,86.55 ; U30.1 90.86,85.71 ; 214.56,73.27 U8.1 ; U8.1 215.46,72.43 ; U8.1 215.46,74.1 ; U8.1 216.35,73.27 ; 71.05,122.29 U5.1 ; U5.1 71.95,123.13 ; U5.1 72.84,122.29 ; U5.1 71.95,121.45 ; U36.1 65.48,36.44 ; U36.1 64.58,35.6 ; U36.1 64.58,37.27 ; U36.1 63.69,36.44 ; 74.93,209.24 J6.2 74.93,212.4 ; 80.45,108.57 U6.1 ; U6.1 81.35,109.41 ; U6.1 82.24,108.57 ; U6.1 81.35,107.74 ; 77.29,55.88 R25.1 ; R25.1 80.19,55.88 ; R25.1 78.74,54.43 ; R25.1 78.74,57.33 ; 63.03,74.3 59.65,74.3 ; J8.1 54.61,212.4 ; J8.1 53.03,210.82 ; J8.1 54.61,209.24 ; 81.97,47.11 U31.1 ; U31.1 82.87,46.27 ; U31.1 82.87,47.94 ; U31.1 83.77,47.11 ; R12.1 167.64,156.39 ; R12.1 166.19,154.94 ; R12.1 169.09,154.94
MCLR/VPP: length 9.2
  TOP w0.508: J6.1 72.39,207.01 R7.1
SCK: length 25.8
  TOP w0.508: U51.12 196.85,100.97 194.94,99.06 191.77,99.06 191.01,98.3 R4.2 ; U52.12 148.59,151.76 145.92,149.1 R5.2
SCK1: length 190.8
  BOTTOM w0.508: J12.1 218.44,5.08 274.32,60.96 J11.1
SDA: length 21.8
  TOP w0.508: 152.78,150.5 149.73,150.5 147.96,148.72 147.96,147.19 R9.2 ; R8.2 194.18,93.22 196.22,95.25 196.22,98.79 197.12,99.69 U51.13
SDI1: length 192.9
  BOTTOM w0.508: J12.2 147.96,9.53 216.53,9.53 271.78,64.77 271.78,101.6 273.05,102.87 J11.2
SDO1: length 195.4
  BOTTOM w0.508: J12.3 149.86,13.97 215.9,13.97 268.61,66.67 268.73,66.67 269.24,67.18 269.24,102.23 272.42,105.41 J11.3
N42242: length 22
  TOP w0.508: U51.16 210.19,99.69 212.72,97.16 212.72,91.31 R17.2 219.2,88.14 R20.1
N42246: length 27.8
  TOP w0.508: 207.9,98.42 209.28,98.42 211.46,96.25 211.46,84.96 R23.2 219.2,80.52 R26.1
N42268: length 16
  TOP w0.508: R14.1 217.68,93.98 R11.2 210.69,100.97 U51.17
N42276: length 20.9
  TOP w0.508: R27.1 170.94,136.4 R24.2 162.18,141.86 U52.15
N42308: length 16.5
  TOP w0.508: R21.1 170.94,144.02 R18.2 167.51,144.15 165.61,144.15 165.1,144.65 165.1,148.95 163.56,150.5 162.18,150.5
N42508: length 16.9
  TOP w0.508: J7.2 69.96,185.53 69.96,192.42 R3.2 R7.2
N42784: length 64.7
  TOP w0.508: v1(179.07,154.31) 191.28,142.09 200.61,142.09 201.61,143.09 U28.2 ; v1(164.47,169.54) 163.32,169.54 155.7,161.93 U52.4
  BOTTOM w0.508: v1(164.47,169.54) 164.47,168.91 v1(179.07,154.31)
N42896: length 34.7
  TOP w0.508: 162.18,158.12 164.47,158.12 171.45,165.1 181.61,165.1 186.12,169.61 U10.2
N43224: length 3.8
  TOP w0.508: J7.1 C9.1
N43624: length 11.3
  TOP w0.508: U52.17 166.37,151.76 166.5,151.64 R12.2 170.94,151.64 R15.1
N104053: length 38.5
  TOP w0.508: U54.1 139.7,94.62 141.6,92.71 145.41,92.71 148.59,95.89 148.59,101.6 152.4,105.41 C7.1
  TOP w1.524: U54.1 130.84,99.03 BT1.1
N111887: length 7.4
  TOP w0.508: R2.2 80.01,205.23 J6.4
N111889: length 7.4
  TOP w0.508: R1.2 82.55,205.23 J6.5
N118143: length 5.8
  TOP w0.508: J3.1 108.74,126.21 U13.27
N118150: length 7.3
  TOP w0.508: J3.2 109.86,122.56 109.86,123.86 108.32,125.4 U13.26
N118163: length 9
  TOP w0.508: J3.3 109.22,120.65 109.22,123.56 108.17,124.61 U13.25
N118167: length 5.6
  TOP w0.508: U13.22 105.59,120.94 106.68,119.84 106.68,118.11 J5.1
N118185: length 5.8
  TOP w0.508: J5.4 103.2,119.71 U13.19
N118192: length 11.6
  TOP w0.508: J2.4 93.98,133.35 93.98,131.46 95.24,130.2 U13.2
N118196: length 11
  TOP w0.508: U13.3 94.64,129.39 92.71,131.32 92.71,133.35 90.17,135.89 J2.3
N118203: length 10.3
  TOP w0.508: J2.2 90.93,133.35 91.44,132.84 91.44,130.81 93.65,128.6 U13.4
N118215: length 8.4
  TOP w0.508: U13.5 91.92,127.79 J2.1
N118227: length 8.8
  TOP w0.508: U13.9 92.86,124.61 J4.3
N118234: length 9.5
  TOP w0.508: U13.10 94.59,123.8 J4.2
N118238: length 11.9
  TOP w0.508: U13.11 96.01,120.14 91.44,115.57 J4.1
N118679: length 5.2
  TOP w0.508: J1.1 103.99,135.74 U13.36
N118686: length 5.9
  TOP w0.508: U13.35 104.8,134.01 J1.2
N118690: length 7.8
  TOP w0.508: U13.34 105.59,133.06 107.78,135.25 109.86,135.25 110.49,135.89 J1.3
N128561: length 4.8
  TOP w0.508: J5.2 105.41,119.67 104.8,120.28 U13.21
N128579: length 5
  TOP w0.508: U13.20 103.99,117.96 J5.3

## Copper pours and planes (outline as drawn; the poured copper is in the pictures)
GND on BOTTOM: 279.4,215.9 279.4,0.64 0.64,0.64 0.64,215.9
5 V on TOP: 279.4,215.9 279.4,0.64 0,0.64 0,215.9
